# Altium PCB Copy of PCB2.PcbDoc
Units mm, origin at the board's own origin, x right, y up, seen from the top; angles counter-clockwise.
Board outline 21.46 x 22.68 mm, 2 copper layers (Top Layer, Bottom Layer); 17 components, 10 nets, 50 pads, 15 vias.
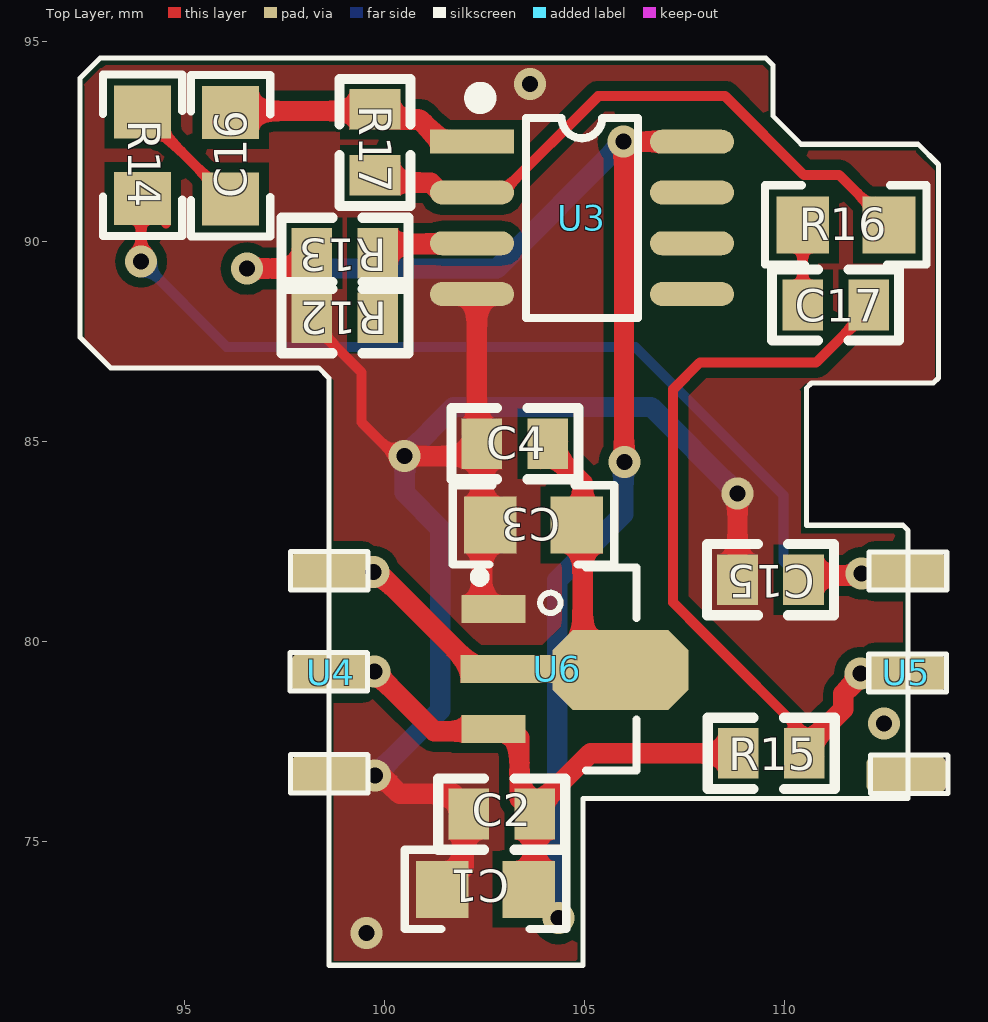
[diagram p0: Top Layer view]
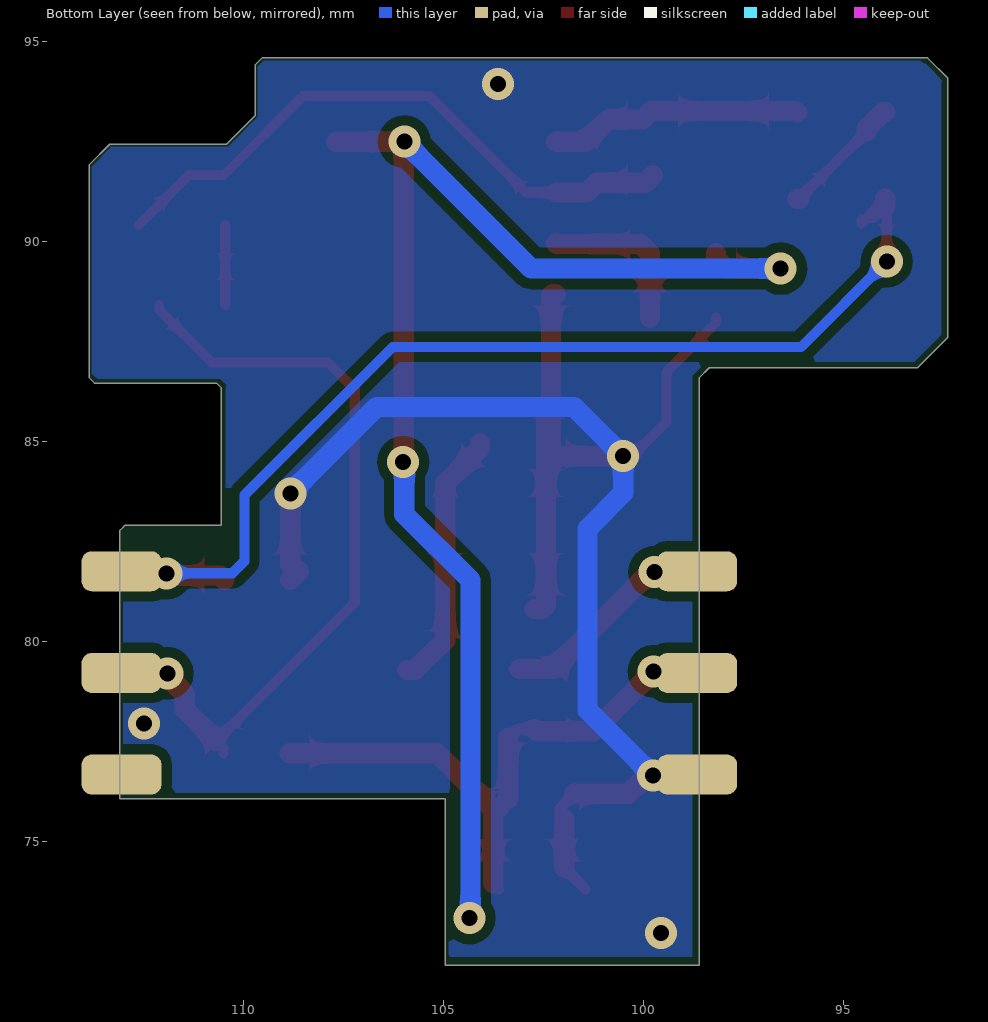
[diagram p1: Bottom Layer view, seen from below]

## Layer stack, top to bottom
Top Solder: solder mask 0.0102, Solder Resist, Dk 3.5
Top Layer: signal copper 0.0356
Dielectric 1: dielectric 0.32, FR-4, Dk 4.8
Bottom Layer: signal copper 0.0356
Bottom Solder: solder mask 0.0102, Solder Resist, Dk 3.5

## Board outline
98.604,71.903 98.604,86.584 98.35,86.838 93.143,86.838 92.381,87.6 92.381,94.077 92.889,94.585 109.526,94.585 109.704,94.407 109.704,93.137 110.415,92.426 113.336,92.426 113.844,91.918 113.844,86.584 113.717,86.457 110.669,86.457 110.542,86.33 110.542,82.901 112.955,82.901 113.082,82.774 113.082,76.068 104.954,76.068 104.954,71.903

## Design rules (kind name [scope] priority, off if disabled: settings)
Clearance [All] p1: gap=0.254 ignorepadtopadclearanceinfootprint=FALSE except(0: Arc-Hole Track-Hole SMDPad-Hole THPad-Hole Via-Hole Fill-Hole Poly-Hole Region-Hole Text-Hole)
PolygonConnect [All] p1: thpad.connectstyle=Relief thpad.reliefconductorwidth=0.254 thpad.reliefentries=4 thpad.polygonreliefangle="90 Angle" thpad.airgapwidth=0.254 smdpad.connectstyle=Direct smdpad.reliefconductorwidth=0.254 smdpad.reliefentries=4 smdpad.polygonreliefangle="90 Angle" smdpad.airgapwidth=0.254 via.connectstyle=Direct via.reliefconductorwidth=0.254 via.reliefentries=4 via.polygonreliefangle="90 Angle" via.airgapwidth=0.254
RoutingVias [All] p1: holewidth=0.711 width=1.27 viastyle="Through Hole" minholewidth=0.3 minwidth=0.8 maxholewidth=0.711 maxwidth=1.27
SolderMaskExpansion [All] p1: expansion=0.102
Width [All] p1: maxlimit=1.27 minlimit=0.254 preferedwidth=0.254
30 further rules are at their usual default settings.

## Components (designator, comment, footprint, x,y, rotation, side; value= is the part's Value field where it differs from the comment)
C1 "10uF" RC0805 103.6,73.8 r180 top
C2 "104" RC0603 102.1,75.68 r0 top
C3 "10uF" RC0805 104.8,82.91 r180 top
C4 "104" RC0603 102.429,84.94 r0 top
C15 "104" RC0603 110.47,81.54 r180 top
C16 "4.7uf" RC0805 96.15,91.06 r90 top
C17 "104" RC0603 110.449,88.41 r0 top
R12 "10K" RC0603 99.831,88.09 r180 top
R13 "10K" RC0603 99.831,89.7 r180 top
R14 "300" RC0805 93.95,93.23 r270 top
R15 "10K" RC0603 108.84,77.2 r0 top
R16 "1K" RC0805 110.451,90.41 r0 top
R17 "50K" RC0603 99.76,93.3 r270 top
U3 "LM358" SOP8_M 104.93,90.585 r0 top
U4 "BOARD1" board1 98.66,78.18 r0 top
U5 "BOARD2" board2 101.79,78.13 r0 top
U6 "AMS1117-3.3" SOT89_M 104.776,79.31 r270 top

## Footprints (in the part's own frame and the unit in brackets; to place one, negate y for a bottom-side part, rotate by r counter-clockwise, add the part's x,y. Pads: shape width x height; smd on the part's side, far side on the other; paste and mask are expansions set on the pad)
board1 [mm]
  rrect50% 2x1 smd: 1(-0.01,3.57) 2(-0.01,1.03) 3(-0.01,-1.51)
  rrect50% 2x1 smd far side: 1(-0.01,3.57) 2(-0.01,1.03) 3(-0.01,-1.51)
board2 [mm]
  rrect50% 2x1 smd: 4(11.25,-1.46) 5(11.25,1.08) 6(11.25,3.62)
  rrect50% 2x1 smd far side: 4(11.25,-1.46) 5(11.25,1.08) 6(11.25,3.62)
RC0603 [mil]
  rect 40x50 smd: 1(0,0) 2(65,0)
  silkscreen extent -30,-35 95,35, body extent 1,-17 64,15, height 18
RC0805 [mil]
  rect 52x56 smd: 1(0,0) 2(85,0)
  silkscreen extent -37,-39 122,39, body extent 4,-26 82,23, height 16
SOP8_M [mm] "5*6*1.8mm（长宽高）"
  rect 2.1x0.6 smd: 1(-2.75,1.905)
  oval 2.1x0.6 smd: 2(-2.75,0.635) 3(-2.75,-0.635) 4(-2.75,-1.905) 5(2.75,-1.905) 6(2.75,-0.635) 7(2.75,0.635) 8(2.75,1.905)
  silkscreen extent -2.69,-2.5 1.4,3.15, body extent -3,-2.5 3,2.5, height 1.9
SOT89_M [mm] "4.6x4.3x1.6mm(长宽高)"
  rect 0.7x1.6 smd: 1(-1.5,-2.054) 3(1.5,-2.054)
  rect 0.7x2.4 smd: 2(0,-1.676)
  oct 2x3.4 smd: 2(0.025,1.118)
  silkscreen extent -2.54,-2.52 2.54,1.52, body extent -2.3,-2.4 2.3,1.9, height 1.6

## Part data
C1 C3: library part Cap2, "Capacitor", PackageDescription="Capacitor; 2 Leads", PackageReference=CAPR5-4X5, Published=23-Sep-2002, Publisher="Altium Limited"
C2 C4 C15 C16 C17: library part Cap, "Capacitor", LatestRevisionDate=17-Jul-2002, LatestRevisionNote="Re-released for DXP Platform.", PackageDescription="Radial Cap, Thru-Hole; 2 Leads; 0.3 in Pin Spacing", PackageReference=RAD-0.3, Published=8-Jun-2000, Publisher="Altium Limited"
R12 R13 R14 R15 R16 R17: library part Res2, "Resistor", LatestRevisionDate=17-Jul-2002, LatestRevisionNote="Re-released for DXP Platform.", PackageDescription="Axial Device, Thru-Hole; 2 Leads; 0.4 in Pin Spacing", PackageReference=AXIAL-0.4, Published=8-Jun-2000, Publisher="Altium Limited"
U3: "音频放大"
U6: "5V稳3.3V"

## Via types
v1: diameter 0.8, hole 0.4, Top Layer to Bottom Layer, tented both sides, 15 vias

## Nets (pads, with @x,y where several pads share a name; then routed paths per layer and width w, separated by ;. In a path a pad name is that pad's centre, name@x,y a point inside that pad or via, vN(x,y) a via of type N, cw(c..) or ccw(c..) an arc to the next point about the centre after c; other vN are vias at no path point)
3V3: C3.1 C4.2 U4.1 U6.2 | length 10.9
  Top Layer w0.508: v1(99.72,81.73) 99.776,81.674 99.886,81.674 102.25,79.31 U6.2@103.1,79.31 ; C4.2 104.08,84.813 104.933,83.96 104.948,83.96 104.948,80.031 105.694,79.285 U6.2@105.894,79.285
5V: C1.1 C2.2 R13.2 R15.1 U3.8 U4.2 U6.3 | length 48.6
  Top Layer w0.254: U6.3 103.147,77.81 U6.3@103.37,77.587 ; C2.2@103.37,76.061 103.591,75.841 C2.2 ; C1.1 C1.1@103.751,73.951
  Top Layer w0.508: v1(96.561,89.319) 97.926,89.319 98.18,89.573 R13.2 ; v1(99.74,79.25) 101.24,77.75 102.662,77.75 U6.3 ; C2.2@103.37,76.061 U6.3@103.37,77.587 ; C2.2@103.591,75.841 103.785,75.841 105.144,77.2 R15.1 ; C1.1@103.751,73.951 C2.2 ; v1(106,84.48) 105.985,84.495 105.985,92.475 v1(105.97,92.49) U3.8
  Bottom Layer w0.508: v1(96.561,89.319) 102.799,89.319 v1(105.97,92.49) ; v1(104.34,73.08) 104.315,73.105 104.315,81.525 105.97,83.18 105.97,84.45 v1(106,84.48)
GND: C1.2 C2.1 C3.2 C4.1 C15.2 R12.2 U3.4 U4.3 U6.1 | length 41.7
  Top Layer w0.254: R12.2 98.18,87.963 99.42,86.723 99.42,85.48 100.27,84.63 v1(100.5,84.63) ; v1(99.76,76.65) v1@99.908,76.65 ; C1.2 C1.2@101.974,74.333 ; C2.1@101.719,76.188 102.1,75.807 C2.1 C2.1@101.974,75.554
  Top Layer w0.508: v1@99.908,76.65 100.37,76.188 C2.1@101.719,76.188 ; v1(100.5,84.63) C4.1@102.246,84.63 ; C1.2@101.974,74.333 C2.1@101.974,75.554 ; C4.1@102.175,84.559 C4.1@102.246,84.63 ; U3.4 102.262,88.68 102.304,88.638 102.304,84.689 C4.1@102.246,84.63 ; C4.1@102.304,84.63 C4.1@102.246,84.63 ; C4.1@102.429,85.549 C4.1 102.429,80.906 102.525,80.81 U6.1 ; C15.2 108.61,81.749 108.647,81.749 108.819,81.921 v1(108.819,83.701)
  Bottom Layer w0.508: v1(99.76,76.65) 101.39,78.28 101.39,82.82 100.5,83.71 v1(100.5,84.63) 101.73,85.86 106.66,85.86 v1(108.819,83.701)
  other v1: 99.55,72.71 112.48,77.95 103.63,93.93
MIC+: C17.2 R15.2 U5.5 | length 18.4
  Top Layer w0.254: R15.2 R15.2@110.491,77.327 ; R15.2@110.672,77.508 107.975,80.205 107.21,80.97 107.21,86.3 107.88,86.97 110.787,86.97 112.1,88.283 C17.2
  Top Layer w0.508: R15.2@110.672,77.508 111.463,78.299 111.463,78.694 111.89,79.121 v1(111.89,79.2)
NetC16_1: C16.1 R14.1 | length 3.1
  Top Layer w0.254: R14.1@94.407,92.752 C16.1@96.099,91.06
  Top Layer w0.508: R14.1 94.001,93.23 94.407,92.824 R14.1@94.407,92.752 ; C16.1@96.099,91.06 C16.1
NetC16_2: C16.2 R17.1 U3.1 | length 6.4
  Top Layer w0.508: C16.2 96.19,93.259 99.801,93.259 100.014,93.046 100.874,93.046 101.43,92.49 U3.1
NetC17_1: C17.1 R16.1 | length 2
  Top Layer w0.254: C17.1 110.449,90.408 R16.1
NetR12_1: R12.1 R13.1 U3.3 | length 4.1
  Top Layer w0.508: R12.1 R13.1 100.063,89.932 102.162,89.932 U3.3
NetR16_2: R16.2 R17.2 U3.2 | length 15.4
  Top Layer w0.254: U3.2 102.93,91.22 105.34,93.63 108.51,93.63 110.48,91.66 111.36,91.66 R16.2
  Top Layer w0.508: R17.2 99.941,91.468 101.157,91.468 101.405,91.22 U3.2
PA1: C15.1 R14.2 U5.6 | length 27
  Top Layer w0.254: v1(93.91,89.5) 93.91,91.038 93.93,91.058 93.95,91.038 R14.2@94.398,90.59 ; R14.2@93.95,90.88 94.24,90.59 R14.2@94.398,90.59 ; R14.2@94.534,90.453 94.534,90.538 94.45,90.538 R14.2@94.398,90.59
  Top Layer w0.508: R14.2@93.95,90.88 93.95,91.038 R14.2 ; C15.1 110.574,81.644 111.864,81.644 v1(111.92,81.7)
  Bottom Layer w0.254: v1(93.91,89.5) 96.05,87.36 106.264,87.36 109.97,83.654 109.97,82 110.27,81.7 v1(111.92,81.7)
pads on no net: U3.5 U3.6 U3.7 U5.4

## Polygon pours and split planes (outlines as drawn)
GND on Bottom Layer "GND_L02_P004" (solid, remove dead copper, pour order 4): 92.97,94.44 92.94,94.44 92.52,94.02 92.55,93.99 92.55,87.66 93.22,86.99 98.42,86.99 98.77,86.64 98.77,72.12 104.82,72.12 104.86,72.16 104.86,76.22 112.98,76.22 113,76.24 113,82.64 112.84,82.8 110.44,82.8 110.44,86.37 110.41,86.4 110.57,86.56 113.65,86.56 113.77,86.68 113.79,86.68 113.79,91.87 113.32,92.34 113.32,92.37 110.37,92.37 109.63,93.11 109.63,94.37 109.49,94.51 92.98,94.51 92.9,94.43
GND on Top Layer "GND_L01_P006" (solid, remove dead copper, pour order 6): 92.926,94.329 92.896,94.329 92.476,93.909 92.506,93.879 92.506,87.549 93.176,86.879 98.376,86.879 98.726,86.529 98.726,72.009 104.776,72.009 104.816,72.049 104.816,76.109 112.936,76.109 112.956,76.129 112.956,82.529 112.796,82.689 110.396,82.689 110.396,86.259 110.366,86.289 110.526,86.449 113.606,86.449 113.726,86.569 113.746,86.569 113.746,91.759 113.276,92.229 113.276,92.259 110.326,92.259 109.586,92.999 109.586,94.259 109.446,94.399 92.936,94.399 92.856,94.319

## Silkscreen, mask and mechanical layers (free items; w line width, h text height)
Top Overlay:
  lines w0.127: 99.561,79.718 97.631,79.718 97.631,78.758 99.571,78.758 99.571,79.708 ; 99.571,77.168 97.641,77.168 97.641,76.208 99.581,76.208 99.581,77.158 ; 114.031,79.688 112.101,79.688 112.101,78.728 114.041,78.728 114.041,79.678 ; 114.041,82.238 112.111,82.238 112.111,81.278 114.051,81.278 114.051,82.228 ; 114.071,77.158 112.141,77.158 112.141,76.198 114.081,76.198 114.081,77.148 ; 92.381,87.6 93.143,86.838 98.35,86.838 98.604,86.584 98.604,81.758 98.604,71.903 104.954,71.903 104.954,76.068 113.082,76.068 113.082,82.774 112.955,82.901 110.542,82.901 110.542,86.33 110.669,86.457 113.717,86.457 113.844,86.584 113.844,91.918 113.336,92.426 110.415,92.426 109.704,93.137 109.704,94.407 109.526,94.585 92.889,94.585 92.381,94.077 92.381,87.6 ; 97.641,81.288 99.581,81.288 99.581,82.238 99.571,82.248 97.641,82.248 97.641,81.288